# Altium PCB буй_кроссовая.PcbDoc
Units mm, origin at the board's own origin, x right, y up, seen from the top; angles counter-clockwise.
Board outline 110 x 60 mm, 2 copper layers (Top Layer, Bottom Layer), stack 1.391 mm thick; 16 components, 27 nets, 87 pads, 2 vias.
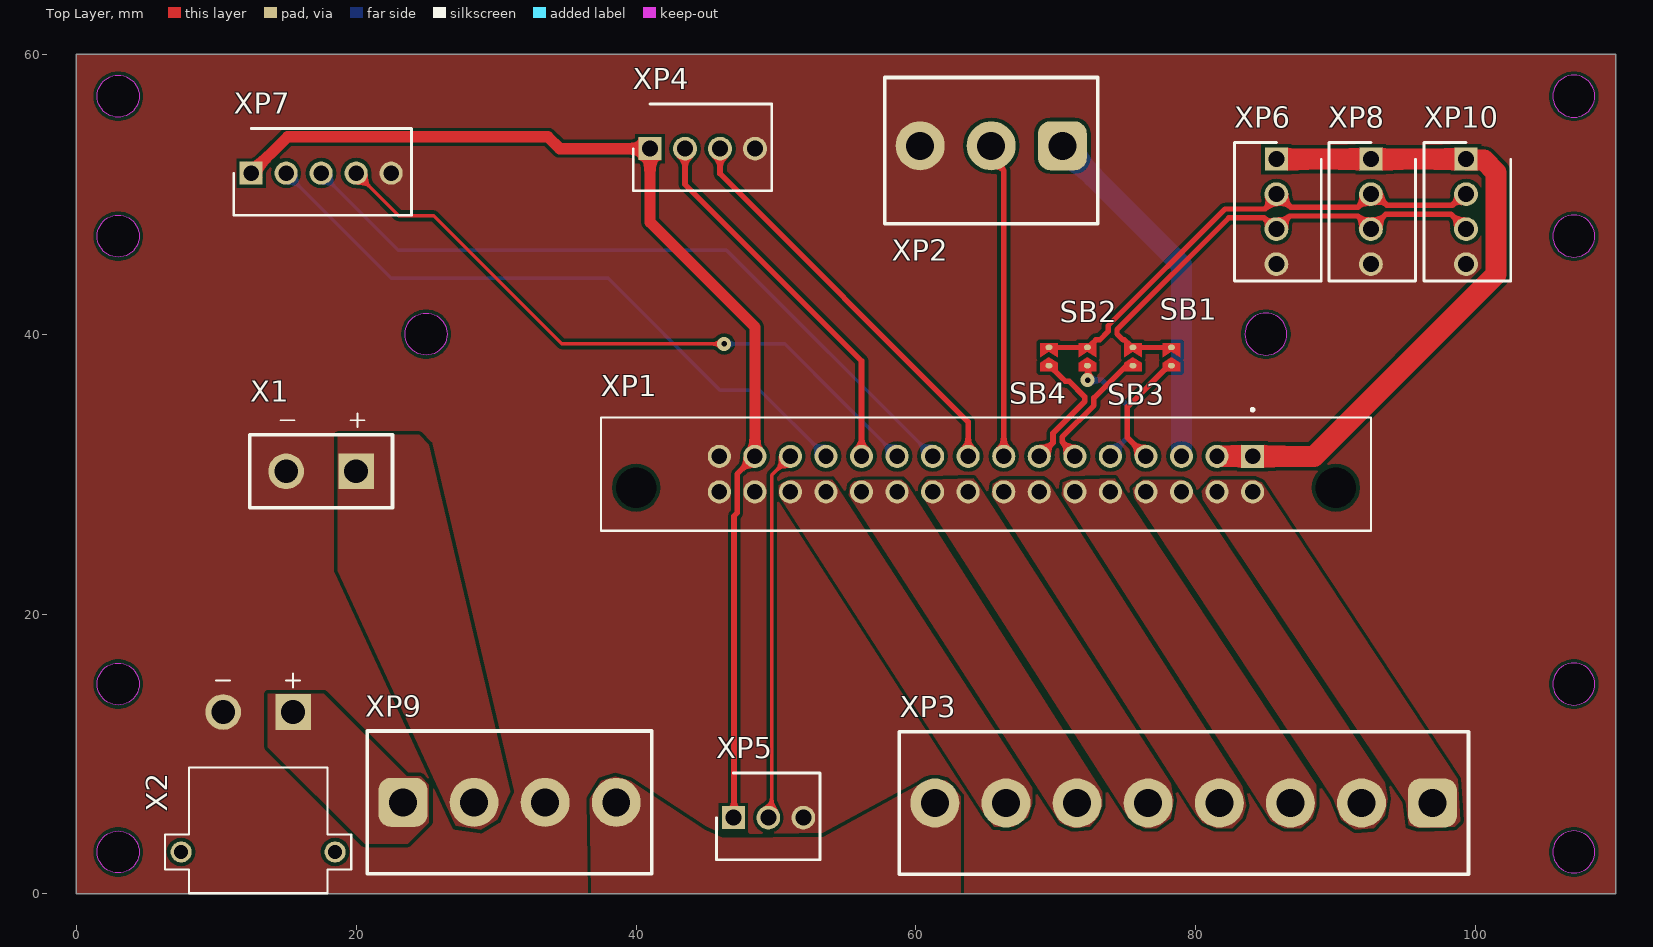
[diagram p0: Top Layer view]
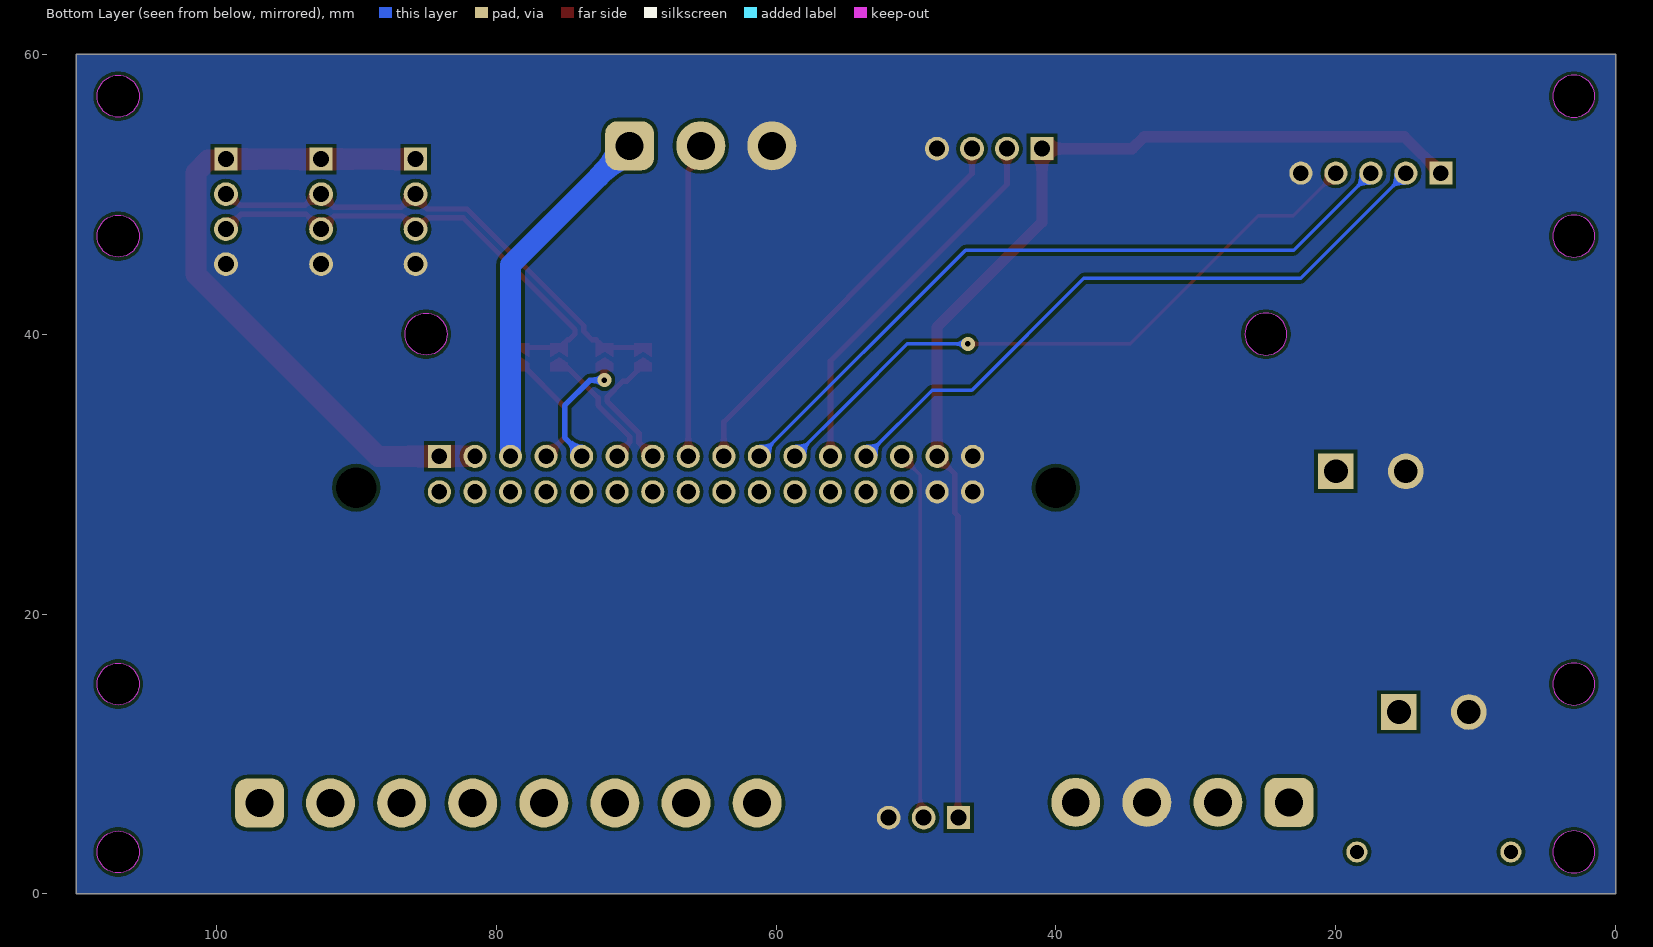
[diagram p1: Bottom Layer view, seen from below]

## Layer stack, top to bottom
Top Solder: solder mask 0.0102, Solder Resist, Dk 3.5
Top Layer: signal copper 0.0356
Dielectric 1: dielectric 1.32, FR-4, Dk 4.8
Bottom Layer: signal copper 0.0356
Bottom Solder: solder mask 0.0102, Solder Resist, Dk 3.5

## Board outline
0,0 0,60 110,60 110,0
cut-out: 83.5,40 ccw(c85,40) 85,38.5 ccw(c85,40) 86.5,40 ccw(c85,40) 85,41.5 ccw(c85,40)
cut-out: 25,38.5 cw(c25,40) 23.5,40 cw(c25,40) 25,41.5 cw(c25,40) 26.5,40 cw(c25,40)
cut-out: 105.5,15 ccw(c107,15) 107,13.5 ccw(c107,15) 108.5,15 ccw(c107,15) 107,16.5 ccw(c107,15)
cut-out: 3,13.5 cw(c3,15) 1.5,15 cw(c3,15) 3,16.5 cw(c3,15) 4.5,15 cw(c3,15)
cut-out: 3,45.5 cw(c3,47) 1.5,47 cw(c3,47) 3,48.5 cw(c3,47) 4.5,47 cw(c3,47)
cut-out: 105.5,47 ccw(c107,47) 107,45.5 ccw(c107,47) 108.5,47 ccw(c107,47) 107,48.5 ccw(c107,47)
cut-out: 105.5,3 ccw(c107,3) 107,1.5 ccw(c107,3) 108.5,3 ccw(c107,3) 107,4.5 ccw(c107,3)
cut-out: 105.5,57 ccw(c107,57) 107,55.5 ccw(c107,57) 108.5,57 ccw(c107,57) 107,58.5 ccw(c107,57)
cut-out: 3,55.5 cw(c3,57) 1.5,57 cw(c3,57) 3,58.5 cw(c3,57) 4.5,57 cw(c3,57)
cut-out: 3,1.5 cw(c3,3) 1.5,3 cw(c3,3) 3,4.5 cw(c3,3) 4.5,3 cw(c3,3)

## Design rules (kind name [scope] priority, off if disabled: settings)
Clearance [All] p1: gap=0.254 ignorepadtopadclearanceinfootprint=FALSE except(0: Arc-Hole Track-Hole SMDPad-Hole THPad-Hole Via-Hole Fill-Hole Poly-Hole Region-Hole Text-Hole)
DiffPairsRouting [All] p1: maxlimit=0.254 minlimit=0.254 mostfreqgap=0.254 toplayer_minwidth=0.381 toplayer_maxwidth=0.381 toplayer_prefwidth=0.381 bottomlayer_minwidth=0.381 bottomlayer_maxwidth=0.381 bottomlayer_prefwidth=0.381 maxuncoupledlength=12.7
HoleSize [All] p1: absolutevalues=TRUE maxlimit=3 minlimit=0.025 maxpercent=80.000 minpercent=20.000
PolygonConnect [All] p1: connectstyle=Direct reliefconductorwidth=0.254 reliefentries=4 polygonreliefangle="90 Angle" airgapwidth=0.254
RoutingVias [All] p1: holewidth=0.4 width=0.4 viastyle="Through Hole" minholewidth=0.4 minwidth=0.4 maxholewidth=0.8 maxwidth=1.5
SilkToSolderMaskClearance [IsPad] p1: minsilkscreentomaskgap=0.2 clearancetoexposedcopper=TRUE
SolderMaskExpansion [All] p1: expansion=0.102 istentingtop=FALSE
Width [All] p1: maxlimit=1.5 minlimit=0.25 preferedwidth=0.3
27 further rules are at their usual default settings.

## Classes and differential pairs
differential pair RS485: +RS485_P -RS485_N
differential pair RS485_2: +RS485_2_P -RS485_2_N
differential pair RS485_1: +RS485_1_P -RS485_1_N

## Components (designator, comment, footprint, x,y, rotation, side; value= is the part's Value field where it differs from the comment)
SB1 "SB" 0805SB 78.875,37.35 r90 top
SB2 "SB" 0805SB 72.875,37.35 r90 top
SB3 "SB" 0805SB 76.125,37.35 r90 top
SB4 "SB" 0805SB 70.125,37.35 r90 top
X1 "XT30UPB-F" XT30UPB-F 17.5,30.2 r180 top locked
X2 "XT30PW-M" XT30PW-M 13,3 r180 top
XP1 "DIN41612_32_2row_straight_mother" DIN41612_32_2row_straight_mother 65,30 r0 top locked
XP2 "MPW-3" MPW-3 70.457,53.459 r180 top
XP3 "MPW-8" MPW-8 96.91,6.5 r180 top
XP4 "KK5045-04AG" KK5045-04AG 41,53.25 r180 top
XP5 "KK5045-03AG" KK5045-03AG 46.95,5.45 r180 top
XP6 "KK5045-04AG" KK5045-04AG 85.75,52.5 r90 top
XP7 "KK5045-05AG" KK5045-05AG 12.5,51.5 r180 top
XP8 "KK5045-04AG" KK5045-04AG 92.5,52.5 r90 top
XP9 "MPW-4" MPW-4 31.005,5.05 r0 top
XP10 "KK5045-04AG" KK5045-04AG 99.3,52.5 r90 top

## Footprints (in the part's own frame and the unit in brackets; to place one, negate y for a bottom-side part, rotate by r counter-clockwise, add the part's x,y. Pads: shape width x height; smd on the part's side, far side on the other; paste and mask are expansions set on the pad)
0805SB [mm]
  oval 0.4x0.5 smd: 1(0.4,0.625) 2(1.7,0.625)
  Top Layer region: 1,1.25 1.4,0.625 1,0 2,0 2,1.25
  Top Layer region: 0,1
  Top Layer region: 0,1.25
  Top Layer region: 0,1.25 0,0 0.6,0 1,0.625 0.6,1.25
  body extent 0.4,0 1.7,1.25, height 0.3
DIN41612_32_2row_straight_mother [mm]
  rect 1.65x1.65 / inner round 1.65 / far side rect 1.65x1.65 hole 1.1: A1(19.05,1.27)
  round 1.65 hole 1.1: A2(16.51,1.27) A3(13.97,1.27) A4(11.43,1.27) A5(8.89,1.27) A6(6.35,1.27) A7(3.81,1.27) A8(1.27,1.27) A9(-1.27,1.27) A10(-3.81,1.27) A11(-6.35,1.27) A12(-8.89,1.27) A13(-11.43,1.27) A14(-13.97,1.27) A15(-16.51,1.27) A16(-19.05,1.27) B1(19.05,-1.27) B2(16.51,-1.27) B3(13.97,-1.27) B4(11.43,-1.27) B5(8.89,-1.27) B6(6.35,-1.27) B7(3.81,-1.27) B8(1.27,-1.27) B9(-1.27,-1.27) B10(-3.81,-1.27) B11(-6.35,-1.27) B12(-8.89,-1.27) B13(-11.43,-1.27) B14(-13.97,-1.27) B15(-16.51,-1.27) B16(-19.05,-1.27)
  round 0 hole 2.9 unplated: ""(-25,-0.97) ""(25,-0.97)
  silkscreen extent -27.5,-4.05 27.5,4.7, body extent -27.45,-4 27.45,4, height 11.6
KK5045-03AG [mm]
  rect 1.65x1.65 / inner round 1.65 / far side rect 1.65x1.65 hole 1.15: 1(0,0)
  round 1.7 hole 1.15: 2(-2.5,0) 3(-5,0)
  silkscreen extent -6.2,-3.2 1.2,3, body extent -6,-3.2 1,2.6, height 11.75
KK5045-04AG [mm]
  rect 1.65x1.65 / inner round 1.65 / far side rect 1.65x1.65 hole 1.15: 1(0,0)
  round 1.7 hole 1.15: 2(-2.5,0) 3(-5,0) 4(-7.5,0)
  silkscreen extent -8.7,-3.2 1.2,3, body extent -8.5,-3.2 1,2.6, height 11.75
KK5045-05AG [mm]
  rect 1.65x1.65 / inner round 1.65 / far side rect 1.65x1.65 hole 1.1: 1(0,0)
  round 1.65 hole 1.1: 2(-2.5,0) 3(-5,0) 4(-7.5,0) 5(-10,0)
  silkscreen extent -11.45,-3.2 1.25,3, body extent -11,-3.2 1,2.6, height 11.75
MPW-3 [mm]
  rrect50% 3.5x3.5 hole 2: 1(0,0)
  round 3.5 hole 2: 2(5.08,0) 3(10.16,0)
  silkscreen extent -2.55,-4.88 12.7,5.56, body extent -2.51,-4.85 12.73,5.6, height 14.17
MPW-4 [mm]
  rrect50% 3.5x3.5 hole 2: 1(-7.66,1.5)
  round 3.5 hole 2: 2(-2.58,1.5) 3(2.5,1.5) 4(7.58,1.5)
  silkscreen extent -10.22,-3.6 10.12,6.6, body extent -10.21,-3.44 10.11,6.65, height 14
MPW-8 [mm]
  rrect50% 3.5x3.5 hole 2: 1(0,0)
  round 3.5 hole 2: 2(5.08,0) 3(10.16,0) 4(15.24,0) 5(20.32,0) 6(25.4,0) 7(30.48,0) 8(35.56,0)
  silkscreen extent -2.56,-5.1 38.1,5.1, body extent -2.55,-4.94 38.09,5.15, height 14
XT30PW-M [mm]
  round 2.55 hole 1.7: N(2.5,-10)
  rect 2.55x2.55 / inner round 2.55 / far side rect 2.55x2.55 hole 1.7: P(-2.5,-10)
  round 1.508 hole 1: S1(5.5,0) S2(-5.5,0)
  silkscreen extent -6.65,-12.75 6.65,2.95, body extent -6.65,-11 6.65,2.95, height 5
XT30UPB-F [mm]
  round 2.55 hole 1.7: N(2.5,0)
  rect 2.55x2.55 / inner round 2.55 / far side rect 2.55x2.55 hole 1.7: P(-2.5,0)
  silkscreen extent -5.1,-4.15 5.1,2.6, body extent -5.1,-2.6 5.1,2.6, height 9.4

## Part data
SB1 SB2 SB3 SB4: "Solder bridge, мост припоя, запаиваемая перемычка, net tie, jumper", Part Number=SB
X1: "30 А (15 продолжительно), прямая мать", Part Number=XT30UPB-F
X2: "30 А (15 продолжительно), 2 контакта разъем угловой отец", Part Number=XT30PW-M
XP1: "DIN41612 (DS1118-32F0V23), Разъем (розетка) тип B 32pin (2х16), шаг 2.54мм двухрядный прямой (ряд АB)", Part Number=DIN41612_32_2row_straight_mother
XP2: "MPW-3 , Вилка на плату 5.08мм прямая 3pin", Value1="Питание на мотор", Value2="концевик норм откр, второй конт на земле", Value3=Общий, Part Number=MPW-3
XP3: "MPW-8 , Вилка на плату 5.08мм прямая 8pin", Value1="панель 1", Value2="панель 2", Value3="панель 3", Value4="панель 4", Value5="панель 5", Value6="панель 6", Value7="панель 7", Value8="Рваный Общий", Part Number=MPW-8
XP4: "Разъем типа провод-плата, 2.5 мм, 4 контакта", Value2="водный дс и дс на дне трубы", Value3="катод диодного датчика lm335,", Value4="Общий, анод lm335 сюда", Part Number=KK5045-04AG, питалово на дс={Value1}
XP5: "Разъем типа провод-плата, 2.5 мм, 3 контакта", Value1="Питание дсов", Value2="дсы на панели", Value3=Общий, Part Number=KK5045-03AG
XP6 XP8 XP10: "Разъем типа провод-плата, 2.5 мм, 4 контакта", Value1="Питание окса", Value2="RS-485 A", Value3="RS-485 B", Value4=Общий, Part Number=KK5045-04AG
XP7: "Разъем типа провод-плата, 2.5 мм, 5 контакта", Value1="питалово на дс", Value2="Сюда один дс воздушный", Value3="питалово на tmp36", Value4="Выход tmp36 сюда", Value5=Общий, Part Number=KK5045-05AG
XP9: "MPW-4 , Вилка на плату 5.08мм прямая 4pin", Value1="плюс аккума", Value2="рваный плюс аккума", Value3=Общий, Value4="Рваный общий", Part Number=MPW-4

## Via types
v1: diameter 1, hole 0.4, Top Layer to Bottom Layer, tented both sides, 2 vias

## Nets (pads, with @x,y where several pads share a name; then routed paths per layer and width w, separated by ;. In a path a pad name is that pad's centre, name@x,y a point inside that pad or via, vN(x,y) a via of type N, cw(c..) or ccw(c..) an arc to the next point about the centre after c; other vN are vias at no path point)
+5_pizdec_clean: XP1.A10 XP7.3 | length 52.1
  Bottom Layer w0.25: XP7.3 23,46 46.46,46 XP1.A10
+5_sw: XP1.A15 XP4.1 XP5.1 XP7.1 | length 81.5
  Top Layer w0.38: 47,27 47.219,27.219 47.219,29.999
  Top Layer w0.4: XP5.1 47,5.5 47,27 ; 47.219,29.999 XP1.A15
  Top Layer w0.8: XP7.1 15.1,54.1 33.7,54.1 34.55,53.25 XP4.1 41,48 48.49,40.51 XP1.A15
+12_akkum: X2.P XP9.1
+12_akkum_rvaniy: X1.P XP9.2
+12_stable: XP1.A1 XP1.A2 XP6.1 XP8.1 XP10.1 | length 48.7
  Top Layer w1.5: XP1.A2 XP1.A1 88.445,31.27 101.448,44.272 101.448,51.546 100.569,52.425 99.375,52.425 XP10.1 XP8.1 XP6.1
+12_vilka: XP1.A3 XP2.1 | length 25.7
  Bottom Layer w1.5: XP2.1 78.97,44.946 XP1.A3
A1: XP1.A9 XP4.3 | length 29.3
  Top Layer w0.4: XP4.3 46,51.463 63.73,33.733 XP1.A9
A2: XP1.A11 XP7.4 | length 47
  Top Layer w0.25: XP7.4 23.05,48.45 25.55,48.45 34.7,39.3 v1(46.3,39.3)
  Bottom Layer w0.25: v1(46.3,39.3) 50.62,39.3 54.84,35.08 XP1.A11
ds18b20_1: XP1.A14 XP5.2 | length 26.5
  Top Layer w0.25: XP5.2 49.694,5.694 49.694,29.934 XP1.A14
ds18b20_2: XP1.A13 XP7.2 | length 46.9
  Bottom Layer w0.25: XP7.2 22.5,44 38,44 46,36 48.84,36 XP1.A13
ds18b20_3: XP1.A12 XP4.2 | length 27.2
  Top Layer w0.4: XP4.2 43.5,50.7 56.11,38.09 XP1.A12
GND: X1.N X2.N XP1.A16 XP1.B15 XP1.B16 XP2.3 XP4.4 XP5.3 XP6.4 XP7.5 XP8.4 XP9.3 XP10.4
GND_panel: XP3.8 XP9.4
koncevik: XP1.A8 XP2.2 | length 22.6
  Top Layer w0.4: XP2.2 65.377,52.579 66.27,51.686 XP1.A8
panel_1: XP1.B1 XP1.B2 XP3.1
panel_2: XP1.B3 XP1.B4 XP3.2
panel_3: XP1.B5 XP1.B6 XP3.3
panel_4: XP1.B7 XP1.B8 XP3.4
panel_5: XP1.B9 XP1.B10 XP3.5
panel_6: XP1.B11 XP1.B12 XP3.6
panel_7: XP1.B13 XP1.B14 XP3.7
RS485_1_N: SB1.1 XP1.A4 | length 8.9
  Top Layer w0.4: XP1.A4 75.1,32.6 75.1,34.8 SB1.1@78.077,37.777 ; SB1.1@78.059,37.795 SB1.1@78.077,37.777 ; 78.3,38.1 78.3,37.75 78.296,37.754 78.1,37.754 SB1.1@78.077,37.777
RS485_1_P: SB2.1 XP1.A5 | length 8.8
  Top Layer w0.381: SB2.1 72.295,37.75 72.304,37.741 72.304,37.55 72.319,37.534 72.319,36.759 v1(72.266,36.705)
  Bottom Layer w0.4: v1(72.266,36.705) 73.295,36.705 75.1,34.9 75.1,32.628 73.89,31.418 XP1.A5
RS485_2_N: SB3.1 XP1.A6 | length 9.3
  Top Layer w0.4: XP1.A6 71.35,31.395 70.444,32.3 70.444,32.644 72.715,34.915 72.715,35.448 75.067,37.8 ; 75.063,37.804 75.067,37.8 ; SB3.1 75.367,37.75 75.313,37.804 75.071,37.804 75.067,37.8
RS485_2_P: SB4.1 XP1.A7 | length 9.1
  Top Layer w0.4: XP1.A7 69.79,32.25 69.79,32.915 72.061,35.186 72.061,35.517 70.956,36.621 70.679,36.621 69.55,37.75 SB4.1
RS485_N: SB1.2 SB3.2 XP6.3 XP8.3 XP10.3 | length 34.5
  Top Layer w0.381: SB1.2 SB3.2 75.445,39.05 74.902,39.592 74.793,39.592 74.368,40.018 74.368,40.333 82.345,48.311 84.867,48.311 85.283,47.895 86.033,47.895 86.069,47.931 86.181,47.931 86.688,48.438 91.562,48.438 XP8.3 93.575,48.575 98.225,48.575 XP10.3
RS485_P: SB2.2 SB4.2 XP6.2 XP8.2 XP10.2 | length 36.1
  Top Layer w0.381: SB4.2 72.305,39.05 72.848,39.592 73.132,39.592 73.733,40.193 73.733,40.596 82.082,48.946 84.946,48.946 85.75,49.75 XP6.2 85.849,50 86.776,49.073 91.573,49.073 92.479,49.979 92.479,50 92.857,50 93.641,49.216 98.335,49.216 99.119,50 XP10.2
pads on no net: X2.S1 X2.S2 XP1.

## Polygon pours and split planes (outlines as drawn)
GND on Top Layer "Top Layer-No Net" (solid, pour order 12): 0,0 0,60 110,60 110,0
+12_akkum_rvaniy on Top Layer "+12_AKKUM_RVANIY_L01_P011" (solid, pour order 11): 18.7,23.087 18.7,30.3 18.7,32.8 24.5,32.8 25.2,32.1 31,7.3 30.1,5.3 28.9,4.6 27.111,4.859 26.4,6.4
+12_akkum on Top Layer "+12_AKKUM_L01_P010" (solid, pour order 10): 17.7,14.3 23.6,8.4 24.6,8.4 25.2,7.8 25.2,5.1 23.7,3.6 20.6,3.6 13.7,10.5 13.7,14.3
GND_panel on Top Layer "GND_PANEL_L01_P009" (solid, pour order 9): 62.5,7.8 63.2,7 63.2,0 36.8,0 36.7,6.8 37.5,8.1 38.5,8.4 39.6,8.1 44.9,4.6 46.2,4 53.4,4.1 60,7.7 61,8.2 62.2,8.1
panel_7 on Top Layer "PANEL_7_L01_P006" (solid, pour order 6): 68.3,7.6 68.3,6.5 68,5.5 67,4.8 65.6,4.8 64.8,5.8 50.2,28.5 50.2,29.2 50.5,29.4 51,29.6 54,29.6 54.3,29.2
panel_6 on Top Layer "PANEL_6_L01_P005" (solid, pour order 5): 73.3,7.3 73.3,6.3 73,5.5 72.4,4.8 71.2,4.7 70.3,5.1 55.2,28.5 55.3,29.2 55.6,29.5 56.3,29.6 59,29.6 59.4,29.2
panel_5 on Top Layer "PANEL_5_L01_P004" (solid, pour order 4): 64.4,29.3 78.2,7.9 78.4,6.7 78.2,5.4 77.2,4.7 76.3,4.7 75.2,5.4 60.4,28.5 60.4,29.1 60.8,29.6 64.1,29.7
panel_4 on Top Layer "PANEL_4_L01_P003" (solid, pour order 3): 69.6,29.2 83.3,7.7 83.6,6.3 83.3,5.4 82.6,4.7 81.4,4.7 80.5,5.1 80,5.7 65.4,28.5 65.5,29.3 66,29.6 69.1,29.6
panel_3 on Top Layer "PANEL_3_L01_P002" (solid, pour order 2): 74.5,29.2 88.6,7.8 88.6,6.3 88.3,5.4 87.5,4.7 86.3,4.7 85.4,5.2 70.4,28.5 70.5,29.4 71,29.6 74.2,29.7
panel_2 on Top Layer "PANEL_2_L01_P001" (solid, pour order 1): 75.6,28.3 89.8,6.8 90.4,5.3 91.4,4.6 92.7,4.7 93.5,5.6 93.7,6.8 93.5,8 79.7,28.8 79.5,29.4 79,29.6 76.2,29.6 75.5,29
panel_1 on Top Layer "PANEL_1_L01_P000" (solid, pour order 0): 98.5,4.8 98.9,5.2 98.7,8.2 84.7,29.4 84.2,29.6 81.1,29.6 80.4,28.8 80.5,28.2 95,6.6 95.2,4.9 95.9,4.7
GND on Bottom Layer "Top Layer-No Net1" (solid, pour order 13): 0,0 0,60 110,60 110,0

## Silkscreen, mask and mechanical layers (free items; w line width, h text height)
Mechanical 1:
  circle w0.254: c85,40 r1.5
  circle w0.254: c25,40 r1.5
  circle w0.254: c3,47 r1.5
  circle w0.254: c3,15 r1.5
  circle w0.254: c107,47 r1.5
  circle w0.254: c107,15 r1.5
  circle w0.254: c3,57 r1.5
  circle w0.254: c3,3 r1.5
  circle w0.254: c107,3 r1.5
  circle w0.254: c107,57 r1.5
  lines w0.254: 0,0 110,0 110,60 0,60 0,0
Mechanical 13:
  lines w0.254: 14.8,34 44.9,34.025